# Altium PCB PCB.PcbDoc
Units mm, origin at the board's own origin, x right, y up, seen from the top; angles counter-clockwise.
Board outline 102.05 x 115.83 mm, 2 copper layers (Top Layer, Bottom Layer); 55 components, 34 nets, 211 pads, 93 vias.
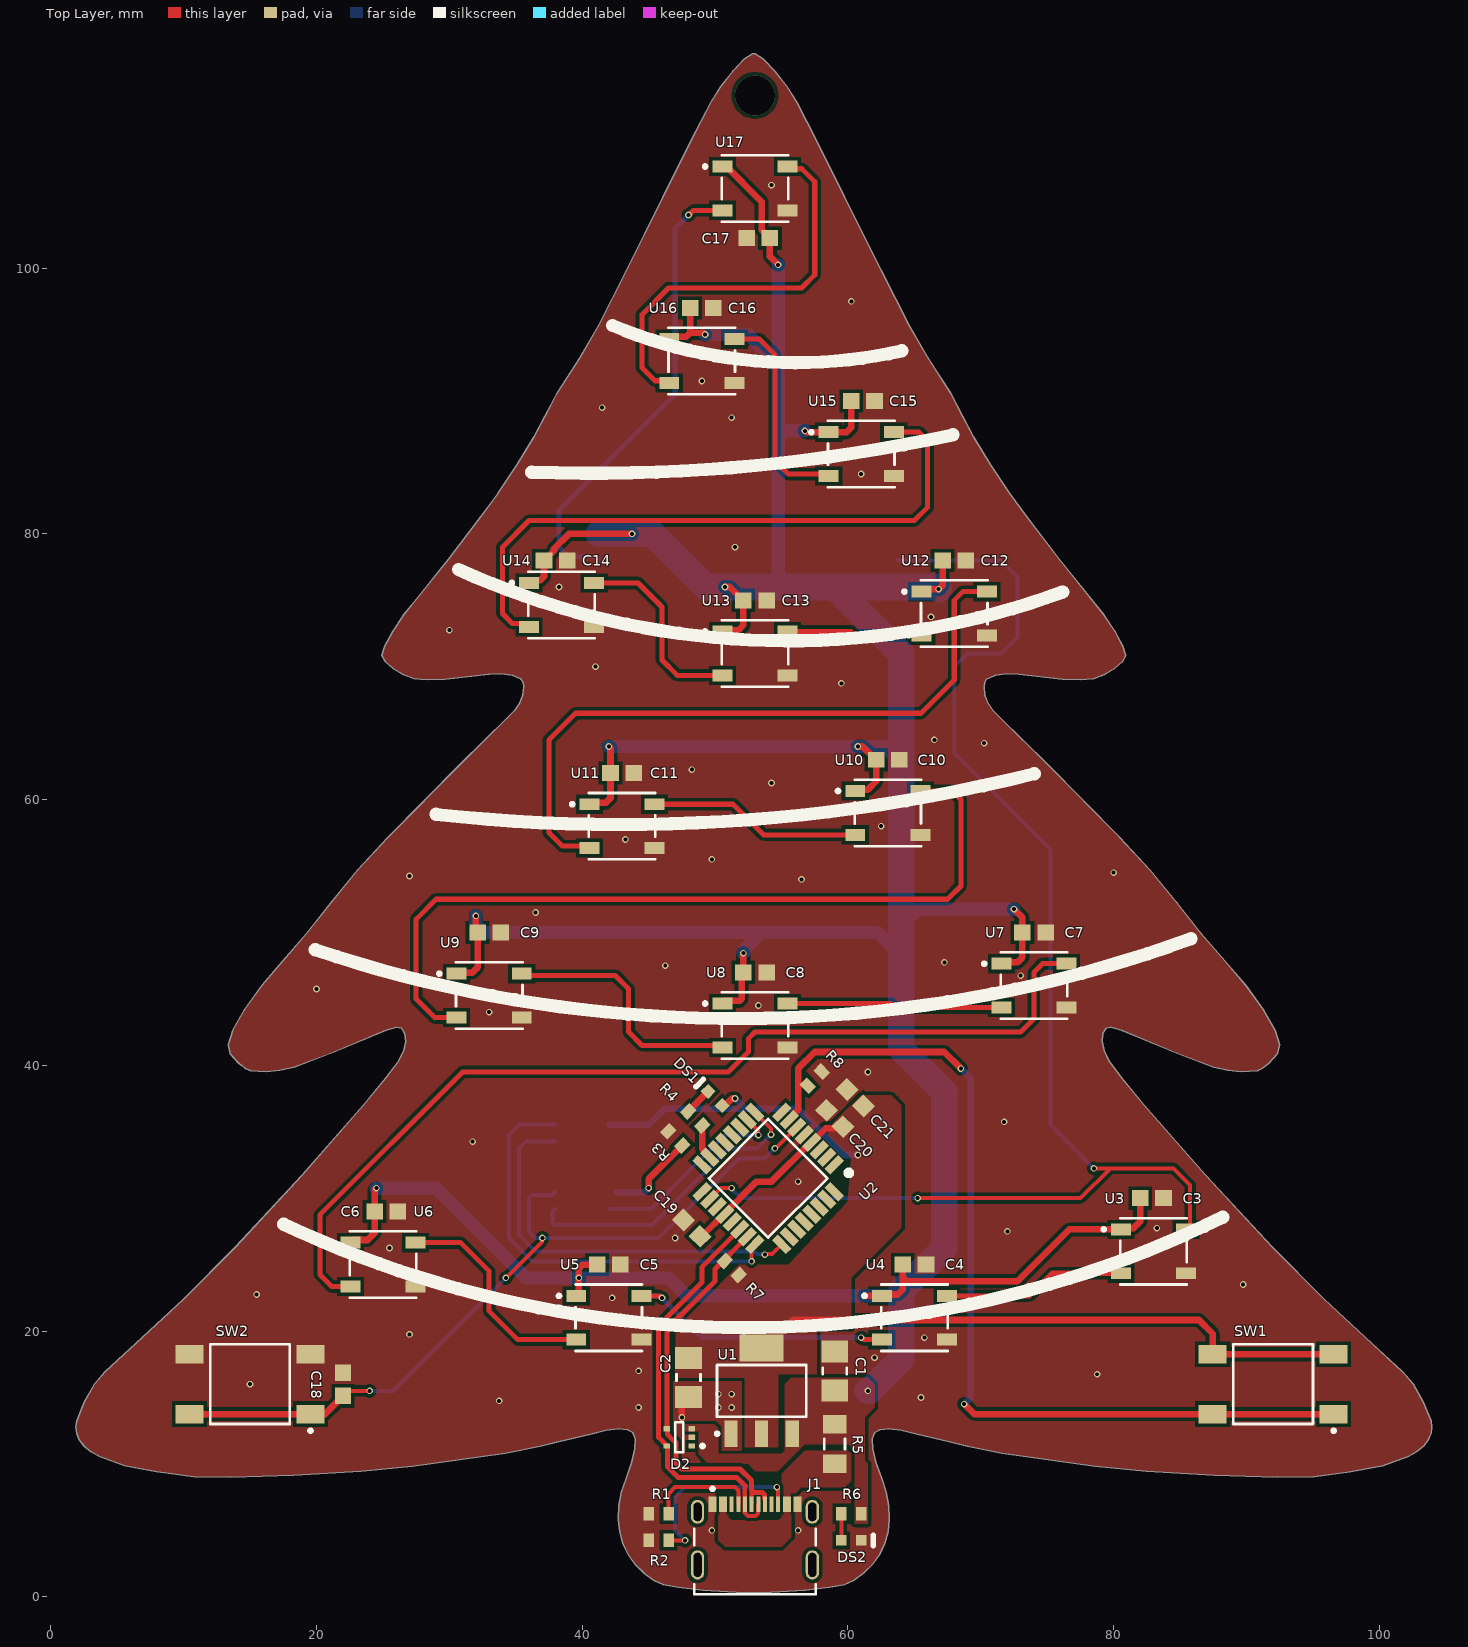
[diagram p0: Top Layer view]
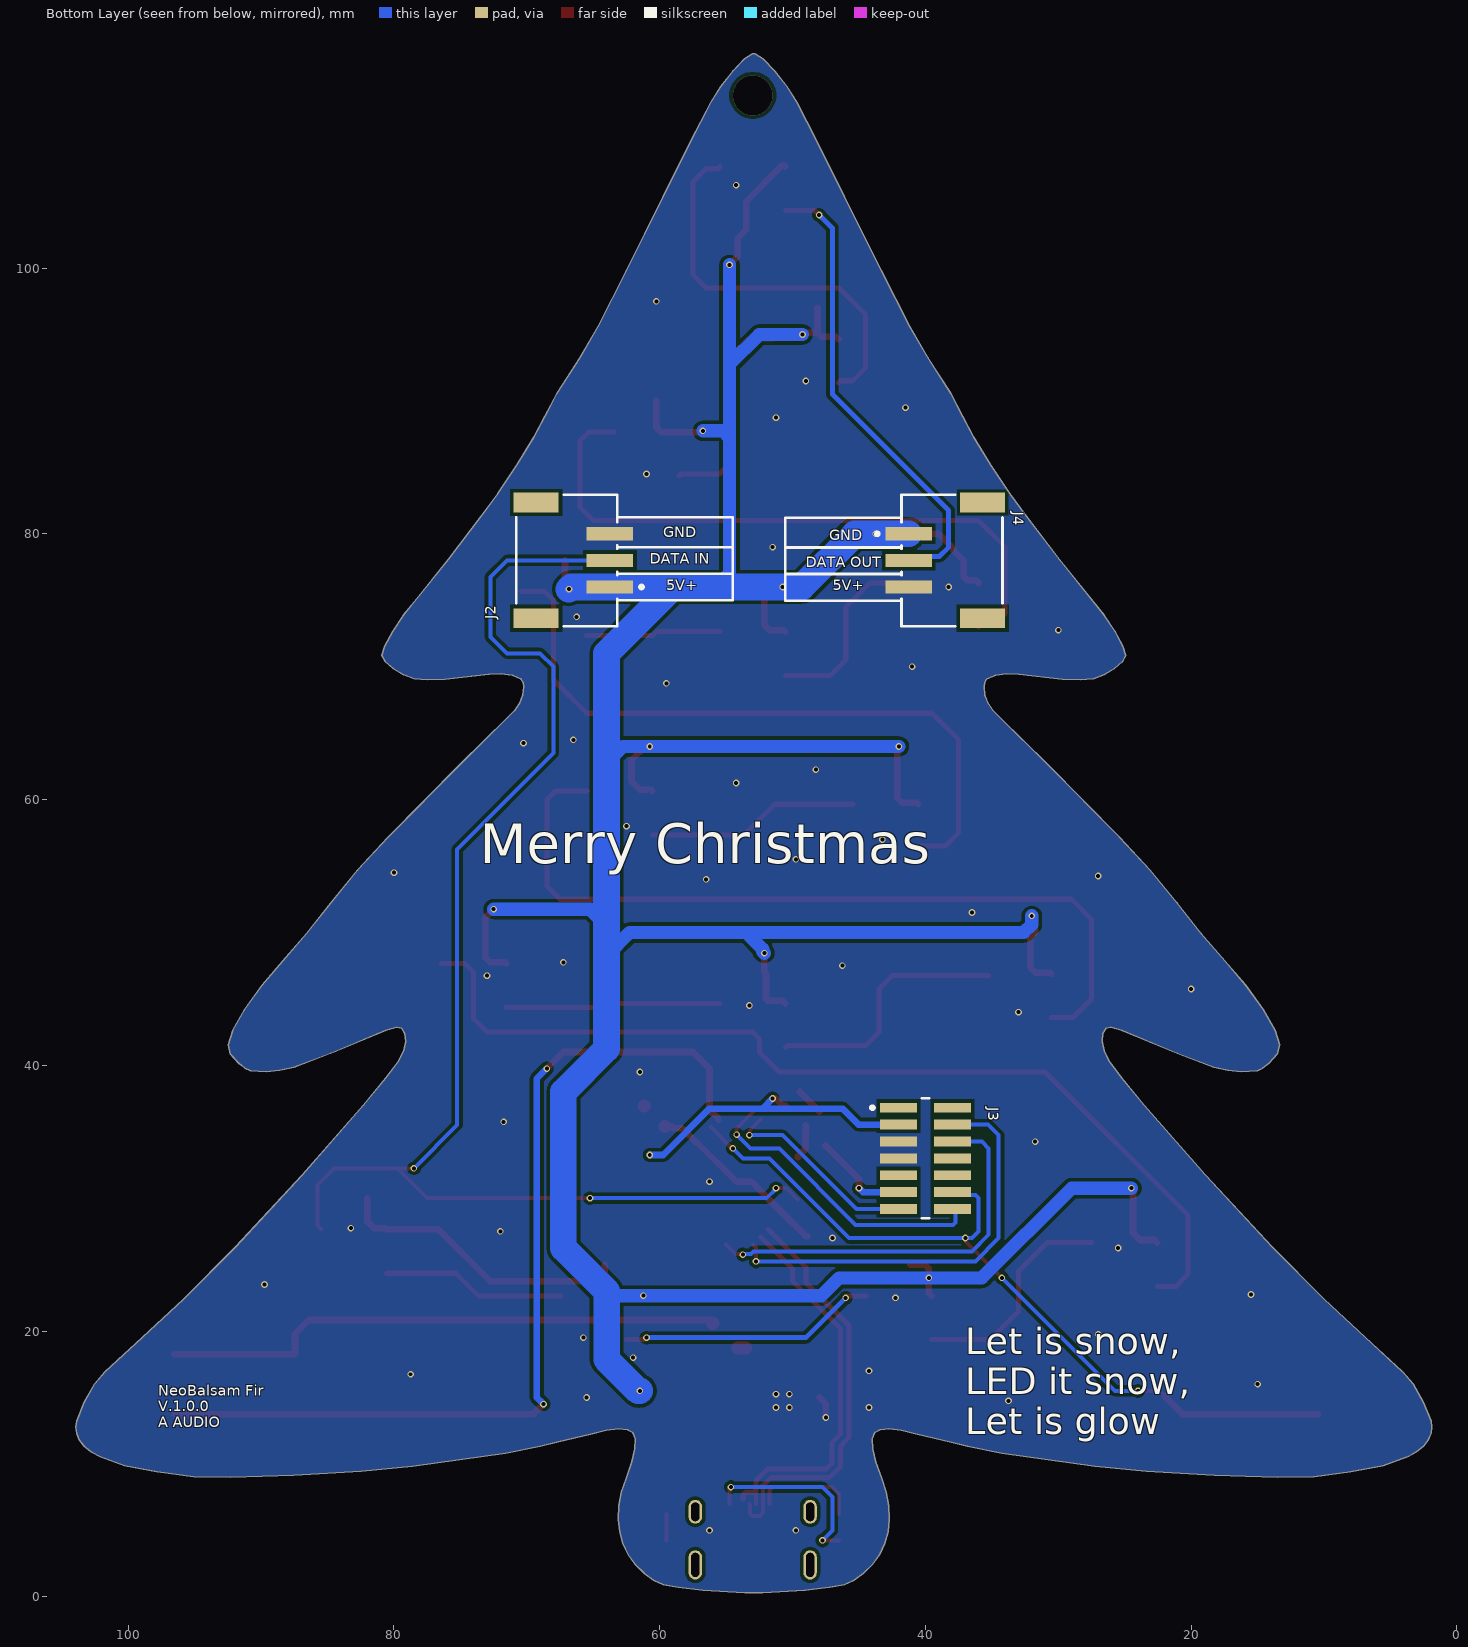
[diagram p1: Bottom Layer view, seen from below]
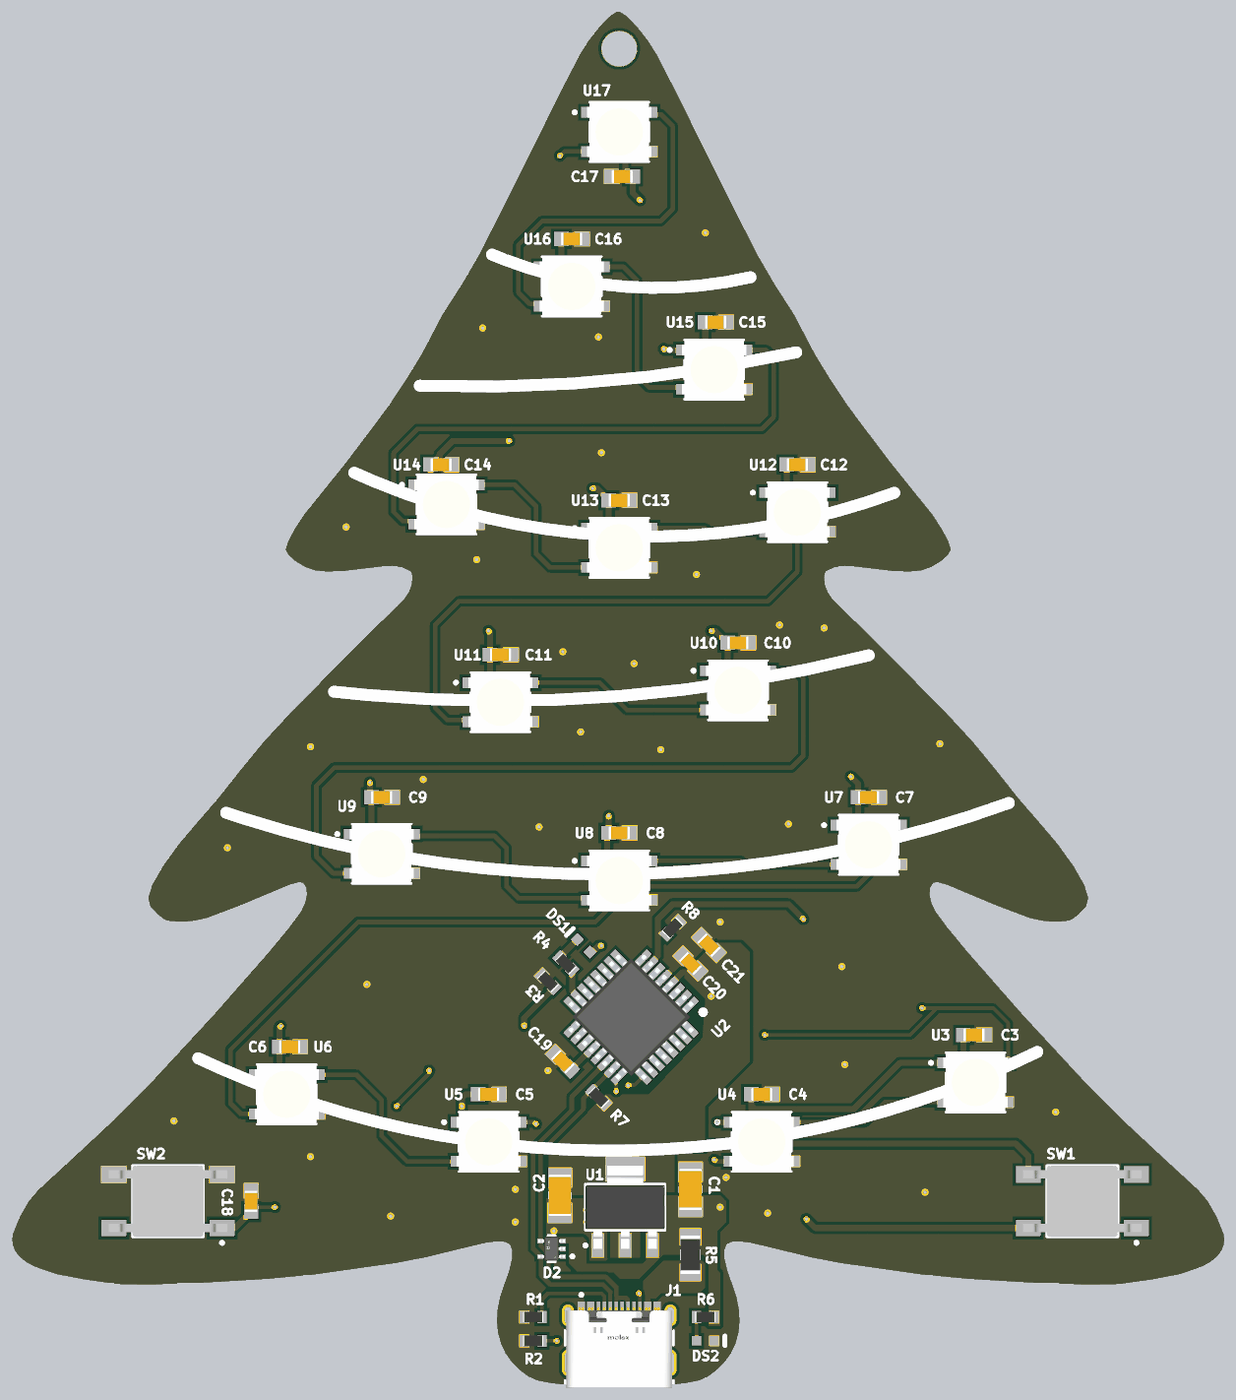
[diagram p2: 3D render of the assembled board from above, using the file's embedded part models]
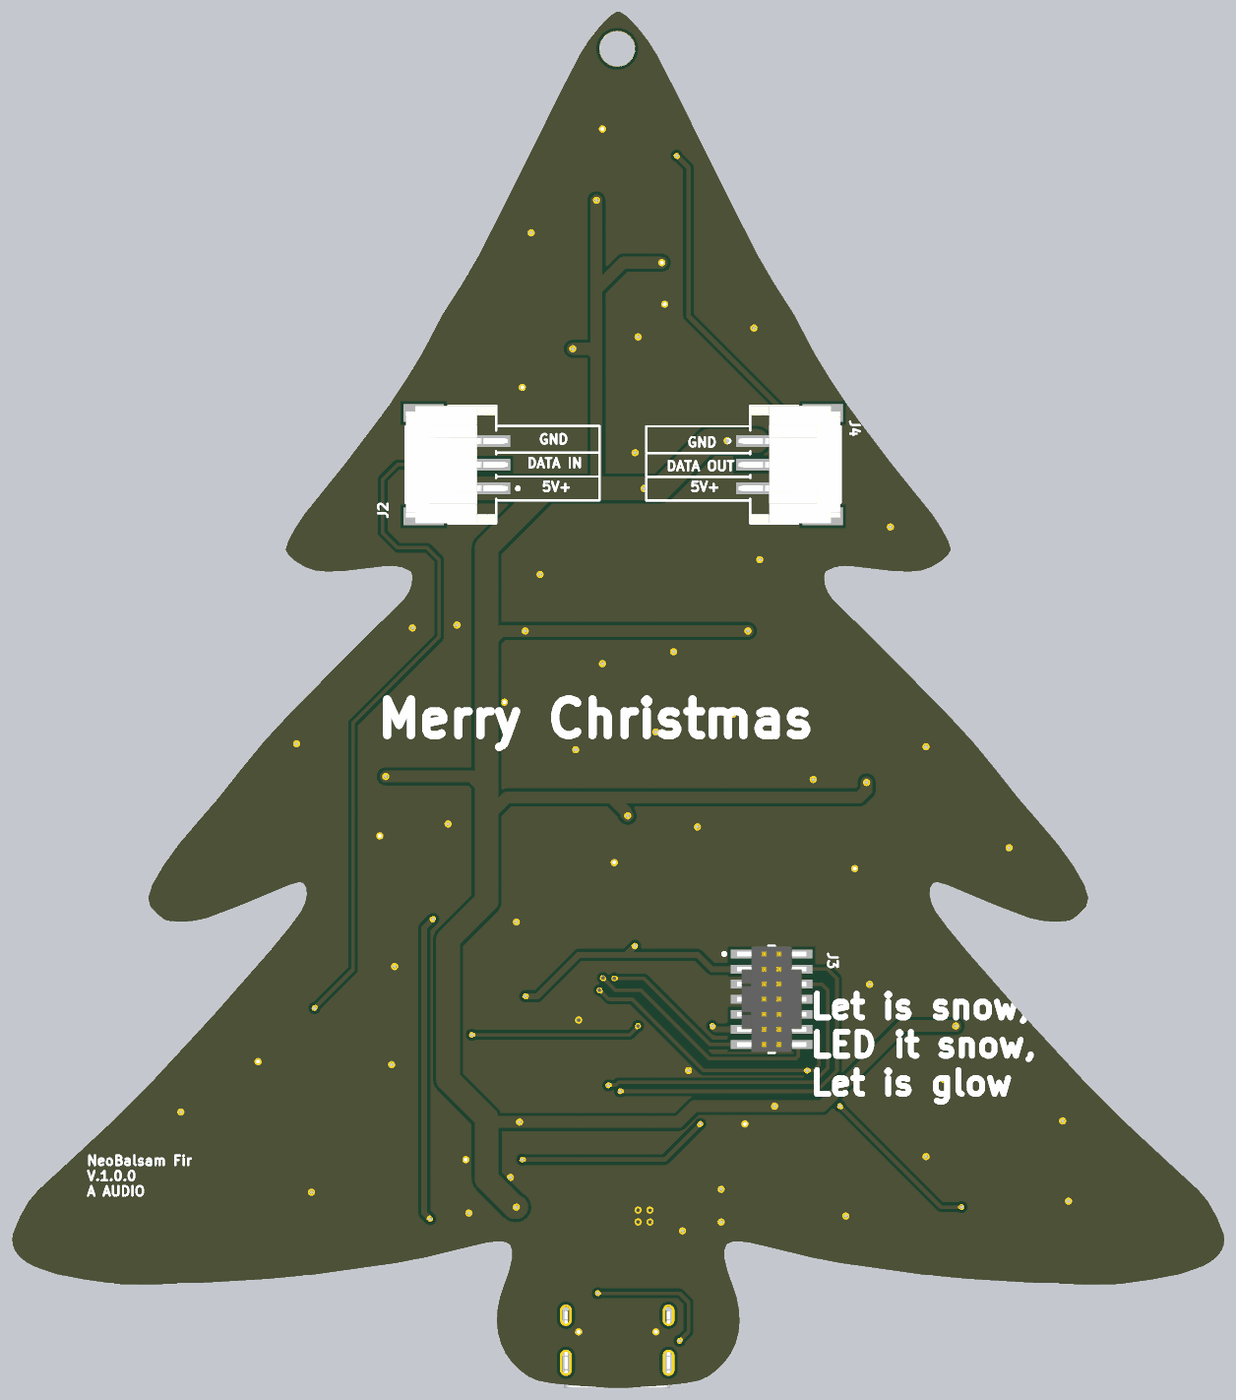
[diagram p3: 3D render of the assembled board from below, using the file's embedded part models]

## Layer stack, top to bottom
Top Solder: solder mask 0.0102, Solder Resist, Dk 3.5
Top Layer: signal copper 0.0356
Dielectric 1: dielectric 0.32, FR-4, Dk 4.8
Bottom Layer: signal copper 0.0356
Bottom Solder: solder mask 0.0102, Solder Resist, Dk 3.5

## Board outline
2.15,11.797 1.951,12.297 1.89,12.76 1.947,13.231 2.527,14.665 3.293,16.009 4.094,16.947 6.892,19.52 10.008,22.417 13.891,26.304 18.921,31.742 23.545,37.007 25.218,39.036 26.207,40.376 26.554,41.098 26.706,41.8 26.656,42.397 26.399,42.803 26.044,42.871 25.233,42.646 21.041,40.892 18.302,39.858 17.235,39.618 16.226,39.522 15.02,39.595 14.612,39.793 14.149,40.157 13.517,40.844 13.348,41.54 13.683,42.617 14.587,44.195 15.9,46.025 17.462,47.863 19.256,49.933 21.067,52.222 23.093,54.691 25.407,57.19 30.824,62.667 34.383,66.172 34.912,66.699 35.294,67.272 35.522,67.876 35.586,68.494 35.546,68.82 35.422,69.042 34.74,69.354 33.884,69.483 32.987,69.433 29.692,69.041 28.335,69.011 27.365,69.103 26.567,69.394 25.776,69.864 25.167,70.388 24.917,70.842 25.141,71.568 25.734,72.666 26.534,73.87 27.378,74.91 29.918,78.066 32.411,81.353 33.654,83.034 35.078,85.174 36.36,87.27 37.181,88.821 38.099,90.583 39.807,93.246 41.189,95.621 43.332,99.827 46.064,105.318 48.174,109.571 49.695,112.514 50.419,113.668 51.342,114.84 52.224,115.752 52.824,116.126 53.009,116.126 53.609,115.752 54.491,114.84 55.415,113.668 56.138,112.514 57.659,109.571 59.769,105.318 62.501,99.827 64.644,95.621 66.027,93.246 67.734,90.583 68.653,88.821 69.474,87.27 70.756,85.174 72.179,83.034 73.422,81.353 75.916,78.066 78.456,74.91 79.299,73.87 80.099,72.666 80.692,71.568 80.916,70.842 80.666,70.388 80.058,69.864 79.267,69.394 78.469,69.103 77.499,69.011 76.142,69.041 72.846,69.433 71.949,69.483 71.094,69.354 70.412,69.042 70.287,68.82 70.247,68.494 70.311,67.876 70.539,67.272 70.922,66.699 71.451,66.172 75.009,62.667 80.427,57.19 82.74,54.691 84.766,52.222 86.577,49.933 88.371,47.863 89.933,46.025 91.246,44.195 92.15,42.617 92.485,41.54 92.317,40.844 91.685,40.157 91.221,39.793 90.813,39.595 89.608,39.522 88.599,39.618 87.531,39.858 84.792,40.892 80.6,42.646 79.79,42.871 79.435,42.803 79.177,42.397 79.127,41.8 79.279,41.098 79.626,40.376 80.615,39.036 82.288,37.007 86.912,31.742 91.943,26.304 95.825,22.417 98.941,19.52 101.739,16.947 102.54,16.009 103.307,14.665 103.886,13.231 103.943,12.76 103.882,12.297 103.683,11.797 103.318,11.334 102.789,10.909 102.102,10.524 100.264,9.88 97.83,9.413 95.071,9.029 92.297,8.988 87.56,9.159 82.454,9.466 78.575,9.829 71.585,10.813 68.99,11.318 67.621,11.662 65.207,12.244 64.019,12.519 63.092,12.632 62.428,12.582 62.032,12.369 61.842,11.895 61.864,11.151 62.093,10.154 62.528,8.923 62.879,7.864 63.078,6.832 63.126,5.839 63.025,4.893 62.778,4.004 62.385,3.181 61.849,2.434 61.172,1.773 60.461,1.242 59.721,0.919 58.605,0.701 56.766,0.49 53.598,0.291 52.235,0.291 49.067,0.49 47.229,0.701 46.112,0.919 45.372,1.242 44.662,1.773 43.984,2.434 43.448,3.181 43.055,4.004 42.808,4.893 42.707,5.839 42.755,6.832 42.954,7.864 43.306,8.923 43.74,10.154 43.97,11.151 43.991,11.895 43.802,12.369 43.405,12.582 42.742,12.632 41.814,12.519 40.627,12.244 38.212,11.662 36.843,11.318 34.248,10.813 27.259,9.829 23.379,9.466 18.273,9.159 13.536,8.988 10.762,9.029 8.004,9.413 5.57,9.88 3.731,10.524 3.044,10.909 2.516,11.334

## Design rules (kind name [scope] priority, off if disabled: settings)
Clearance [All] p1: gap=0.254 ignorepadtopadclearanceinfootprint=TRUE except(0.125: Arc-Arc Arc-Track Arc-SMDPad Track-Track Track-SMDPad)
ComponentClearance [All] p1: gap=0.254 collisioncheckmode=3 verticalgap=2540 showdistances=FALSE
DiffPairsRouting [All] p1: maxlimit=0.254 minlimit=0.254 mostfreqgap=0.254 toplayer_minwidth=0.381 toplayer_maxwidth=0.381 toplayer_prefwidth=0.381 bottomlayer_minwidth=0.381 bottomlayer_maxwidth=0.381 bottomlayer_prefwidth=0.381 maxuncoupledlength=12.7
Height [All] p1: minheight=0 maxheight=1000 prefheight=12.7
HoleSize [All] p1: absolutevalues=TRUE maxlimit=8 minlimit=0.025 maxpercent=80.000 minpercent=20.000
PolygonConnect PolygonDirect [(IsNamedPolygon('PolygonDirect'))] p1: connectstyle=Direct reliefconductorwidth=0.254 reliefentries=4 polygonreliefangle="90 Angle" airgapwidth=0.254
PolygonConnect [All] p2: connectstyle=Relief reliefconductorwidth=0.254 reliefentries=4 polygonreliefangle="90 Angle" airgapwidth=0.254
RoutingVias [All] p1: holewidth=0.6 width=0.8 viastyle="Through Hole" minholewidth=0.3 minwidth=0.5 maxholewidth=1 maxwidth=2
SolderMaskExpansion [All] p1: expansion=0.05 istentingtop=FALSE
SupplyNets "Schematic Supply Nets_5" [InNet('5V')] p1: voltage=0.000
SupplyNets "Schematic Supply Nets_4" [InNet('3V3')] p2: voltage=0.000
SupplyNets "Schematic Supply Nets" [InNet('GND')] p3: voltage=0.000
Width [All] p1: maxlimit=5 minlimit=0.1 preferedwidth=0.3 minimp=50.000000 maximp=50.000000 favimp=50.000000
26 further rules are at their usual default settings.

## Classes and differential pairs
differential pair USB_D: +USB_D_P -USB_D_N

## Components (designator, comment, footprint, x,y, rotation, side; value= is the part's Value field where it differs from the comment)
C1 "Capacitor 1 uF +/-10% 100V 1206" CAPC3216X19M 59,17 r270 top value="1 uF"
C2 "Capacitor 4.7 uF +/-10% 50V 1206" CAPC3216X19M 48,16.5 r90 top value="4.7 uF"
C3 "Capacitor 0.1 uF 10 % 50V 0603" CAPC1609X09M 82.875,30 r180 top value=100nF
C4 "Capacitor 0.1 uF 10 % 50V 0603" CAPC1609X09M 65,25 r180 top value=100nF
C5 "Capacitor 0.1 uF 10 % 50V 0603" CAPC1609X09M 42,25 r180 top value=100nF
C6 "Capacitor 0.1 uF 10 % 50V 0603" CAPC1609X09M 25.25,29 r180 top value=100nF
C7 "Capacitor 0.1 uF 10 % 50V 0603" CAPC1609X09M 74,50 r180 top value=100nF
C8 "Capacitor 0.1 uF 10 % 50V 0603" CAPC1609X09M 53,47 r180 top value=100nF
C9 "Capacitor 0.1 uF 10 % 50V 0603" CAPC1609X09M 33,50 r180 top value=100nF
C10 "Capacitor 0.1 uF 10 % 50V 0603" CAPC1609X09M 63,63 r180 top value=100nF
C11 "Capacitor 0.1 uF 10 % 50V 0603" CAPC1609X09M 43,62 r180 top value=100nF
C12 "Capacitor 0.1 uF 10 % 50V 0603" CAPC1609X09M 68,78 r180 top value=100nF
C13 "Capacitor 0.1 uF 10 % 50V 0603" CAPC1609X09M 53,75 r180 top value=100nF
C14 "Capacitor 0.1 uF 10 % 50V 0603" CAPC1609X09M 38,78 r180 top value=100nF
C15 "Capacitor 0.1 uF 10 % 50V 0603" CAPC1609X09M 61.125,90 r180 top value=100nF
C16 "Capacitor 0.1 uF 10 % 50V 0603" CAPC1609X09M 49,97 r180 top value=100nF
C17 "Capacitor 0.1 uF 10 % 50V 0603" CAPC1609X09M 53.25,102.25 r0 top value=100nF
C18 "Capacitor 0.1 uF 10 % 50V 0603" CAPC1609X09M 22,16 r270 top value=100nF
C19 "Capacitor 0.1 uF 10 % 50V 0603" CAPC1609X09M 48.25,27.75 r135 top value=100nF
C20 "Capacitor 0.1 uF 10 % 50V 0603" CAPC1609X09M 59,36 r135 top value=100nF
C21 "Capacitor 4.7 uF 10 % 35V 0603" CAPC1609X09M 60.556,37.557 r315 top value=4.7µF
D2 "SP3003-02JTG" FP-SP3003-02JTG-MFG 47.3,12 r180 top value=0.65pF
DS1 "19-217/R6C-AL1M2VY/3T" EVRL-0603-2_V 50,37.5 r135 top
DS2 "19-217/R6C-AL1M2VY/3T" EVRL-0603-2_V 60.25,4.25 r0 top
J1 "217179-0001" FP-2171790001-MFG 53,3.55 r0 top
J2 "S3B-PH-SM4-TB(LF)(SN)" FP-S3B-PH-SM4-TB_LF_SN-MFG 67,78 r90 bottom
J3 "FTSH-107-01-F-DV-K" FP-FTSH-107-01-F-DV-K-MFG 40,33 r270 bottom
J4 "S3B-PH-SM4-TB(LF)(SN)" FP-S3B-PH-SM4-TB_LF_SN-MFG 38,78 r270 bottom
R1 "5K1 1 0603" RESC1608X55X25ML10T15 45.75,6.25 r0 top value=5.1k
R2 "5K1 1 0603" RESC1608X55X25ML10T15 45.75,4.25 r180 top value=5.1k
R3 "100R 1 0603" RESC1608X55X25ML10T15 47,34.5 r315 top value=100R
R4 "1K5 1 0603" RESC1608X55X25ML10T15 48.5,36 r315 top value=1.5k
R5 "Jumper 1206" RESC3116X70X50ML13T20 59,11.5 r90 top value=0
R6 "5K1 1 0603" RESC1608X55X25ML10T15 60.25,6.25 r180 top value=5.1k
R7 "1K5 1 0603" RESC1608X55X25ML10T15 51.25,24.75 r315 top value=1.5k
R8 "5K1 1 0603" RESC1608X55X25ML10T15 57.5,39 r45 top value=5.1k
SW1 "FSM4JSMA" TECO-FSM4JSMA_V 92,16 r270 top
SW2 "FSM4JSMA" TECO-FSM4JSMA_V 15,16 r270 top
U1 "LD1117S33TR" STM-SOT-223_M 53.5,15.5 r90 top
U2 "STM32G0B1KET6N" STM32G0B1KET6N-Footprint-1 54,31.5 r225 top
U3 "WS2812B" ADAI-WS2812B_V 83,26 r0 top
U4 "WS2812B" ADAI-WS2812B_V 65,21 r0 top
U5 "WS2812B" ADAI-WS2812B_V 42,21 r0 top
U6 "WS2812B" ADAI-WS2812B_V 25,25 r0 top
U7 "WS2812B" ADAI-WS2812B_V 74,46 r0 top
U8 "WS2812B" ADAI-WS2812B_V 53,43 r0 top
U9 "WS2812B" ADAI-WS2812B_V 33,45.25 r0 top
U10 "WS2812B" ADAI-WS2812B_V 63,59 r0 top
U11 "WS2812B" ADAI-WS2812B_V 43,58 r0 top
U12 "WS2812B" ADAI-WS2812B_V 68,74 r0 top
U13 "WS2812B" ADAI-WS2812B_V 53,71 r0 top
U14 "WS2812B" ADAI-WS2812B_V 38.45,74.65 r0 top
U15 "WS2812B" ADAI-WS2812B_V 61,86 r0 top
U16 "WS2812B" ADAI-WS2812B_V 49,93 r0 top
U17 "WS2812B" ADAI-WS2812B_V 53,106 r0 top

## Footprints (in the part's own frame and the unit in brackets; to place one, negate y for a bottom-side part, rotate by r counter-clockwise, add the part's x,y. Pads: shape width x height; smd on the part's side, far side on the other; paste and mask are expansions set on the pad)
ADAI-WS2812B_V [mm] "SMD, 4-Leads, Body 5x5mm, Pitch 3.3mm"
  rect 1.5x0.9 smd: 1(-2.45,1.65) 2(-2.45,-1.65) 3(2.45,-1.65) 4(2.45,1.65)
  silkscreen extent -3.87,-2.5 2.5,2.5, body extent -2.7,-2.5 2.7,2.5, height 1.69
CAPC1609X09M [mm] "Chip Capacitor, 2-Leads, Body 1.65x0.90mm, IPC Low Density"
  rect 1.25x1.2 smd: 1(-0.875,0) 2(0.875,0)
  body extent -0.9,-0.55 0.9,0.55, height 0.9
CAPC3216X19M [mm] "Chip Capacitor, 2-Leads, Body 3.20x1.60mm, IPC Low Density"
  rect 1.65x2 smd: 1(-1.475,0) 2(1.475,0)
  silkscreen extent -0.25,-0.9 0.25,0.9, body extent -1.75,-0.95 1.75,0.95, height 1.9
EVRL-0603-2_V [mm] "SMD, 2-Leads, Body 1.6x0.8mm"
  rect 0.8x0.8 smd: 1(-0.75,0) 2(0.75,0)
  silkscreen extent 1.65,-0.4 1.65,0.4, body extent -0.8,-0.4 0.8,0.4, height 0.5
FP-2171790001-MFG [mm]
  rrect100% 1x1.8 hole 1.4 slot 0.6 at 0 deg paste-2539.97 mask+0: 1(-4.32,2.85) 2(4.32,2.85)
  rrect100% 1x2.2 hole 1.8 slot 0.6 at 0 deg paste-2539.97 mask+0: 3(-4.32,-1.15) 4(4.32,-1.15)
  rect 0.6x1.15 smd paste+0 mask+0: A1-B12(-3.2,3.425) A4-B9(-2.4,3.425) B1-A12(3.2,3.425) B4-A9(2.4,3.425)
  rect 0.3x1.15 smd paste+0 mask+0: A5(-1.25,3.425) A6(-0.25,3.425) A7(0.25,3.425) A8(1.25,3.425) B5(1.75,3.425) B6(0.75,3.425) B7(-0.75,3.425) B8(-1.75,3.425)
  silkscreen extent -4.57,-3.35 4.57,4.7, body extent -4.47,-3.25 4.47,3.5, height 3.36
FP-FTSH-107-01-F-DV-K-MFG [mm]
  rect 0.74x2.79 smd paste+0 mask+0: 1(-3.81,-2.035) 2(-3.81,2.035) 3(-2.54,-2.035) 4(-2.54,2.035) 5(-1.27,-2.035) 6(-1.27,2.035) 7(0,-2.035) 8(0,2.035) 9(1.27,-2.035) 10(1.27,2.035) 11(2.54,-2.035) 12(2.54,2.035) 13(3.81,-2.035) 14(3.81,2.035)
  silkscreen extent -4.51,-4.12 4.51,0.27, body extent -4.45,-2.92 4.45,2.92, height 6.38
FP-S3B-PH-SM4-TB_LF_SN-MFG [mm]
  rect 1x3.5 smd paste+0 mask+0: 1(-2,-3.25) 2(0,-3.25) 3(2,-3.25)
  rect 1.5x3.4 smd paste+0 mask+0: 4(-4.35,2.3) 5(4.35,2.3)
  silkscreen extent -4.95,-5.75 4.95,3.8, body extent -4.95,-4.8 4.95,3.8, height 5.6
FP-SP3003-02JTG-MFG [mm]
  rect 0.5x0.4 smd paste+0 mask+0: 1(-0.95,0.65) 2(-0.95,0) 3(-0.95,-0.65) 4(0.95,-0.65) 5(0.95,0.65)
  silkscreen extent -1.88,-1.12 0.3,1.12, body extent -1.1,-1.02 1.1,1.02, height 1.1
RESC1608X55X25ML10T15 [mm] "Chip Resistor, 2-Leads, Body 1.70x0.90mm, IPC Low Density"
  rect 0.8x1 smd: 1(-0.75,0) 2(0.75,0)
  body extent -0.85,-0.45 0.85,0.45, height 0.55
RESC3116X70X50ML13T20 [mm] "Chip Resistor, 2-Leads, Body 3.25x1.65mm, IPC Low Density"
  rect 1.4x1.75 smd: 1(-1.5,0) 2(1.5,0)
  silkscreen extent -0.4,-0.77 0.4,0.77, body extent -1.63,-0.82 1.63,0.82, height 0.7
STM32G0B1KET6N-Footprint-1 [mm]
  rect 1.475x0.6 smd: 1(-4.238,2.8) 2(-4.238,2) 3(-4.238,1.2) 4(-4.238,0.4) 5(-4.238,-0.4) 6(-4.238,-1.2) 7(-4.238,-2) 8(-4.238,-2.8) 17(4.238,-2.8) 18(4.238,-2) 19(4.238,-1.2) 20(4.238,-0.4) 21(4.238,0.4) 22(4.238,1.2) 23(4.238,2) 24(4.238,2.8)
  rect 0.6x1.475 smd: 9(-2.8,-4.238) 10(-2,-4.238) 11(-1.2,-4.238) 12(-0.4,-4.238) 13(0.4,-4.238) 14(1.2,-4.238) 15(2,-4.238) 16(2.8,-4.238) 25(2.8,4.238) 26(2,4.238) 27(1.2,4.238) 28(0.4,4.238) 29(-0.4,4.238) 30(-1.2,4.238) 31(-2,4.238) 32(-2.8,4.238)
  silkscreen extent -4.77,-3.15 3.15,4.2, body extent -4.5,-4.5 4.5,4.5, height 1.6
STM-SOT-223_M [mm] "SOT223, 4-Leads, Body 6.7x3.7mm, Pitch 2.3mm, IPC Low Density"
  rect 2x1 smd: 1(-3.225,2.3) 2(-3.225,0) 3(-3.225,-2.3)
  rect 2x3.3 smd: 4(3.225,0)
  silkscreen extent -3.35,-3.35 1.95,3.47, body extent -3.5,-3.35 3.5,3.35, height 1.8
TECO-FSM4JSMA_V [mm] "SMD, 4-Leads, Body 6x6mm, Pitch 4.5mm"
  rect 1.4x2.1 smd: 1(2.25,4.55) 2(2.25,-4.55) 3(-2.25,4.55) 4(-2.25,-4.55)
  silkscreen extent -3,-3 3.62,4.68, body extent -3,-5 3,5, height 5.08

## Part data
C1: library part CMP-001-01157-1, "CAP CER 1UF 100V X7R 1206", Capacitor Type=Ceramic, Case/Package=1206, Tolerance=+/-10%, Voltage Rating=100V, Component Type="Surface Mount", Mounting Technology="Surface Mount", RoHS Compliant=Yes
C2: library part CMP-001-01179-1, "CAP CER 4.7UF 50V X7R 1206", Capacitor Type=Ceramic, Case/Package=1206, Tolerance=+/-10%, Voltage Rating=50V, Component Type="Surface Mount", Mounting Technology="Surface Mount", RoHS Compliant=Yes
C3 C4 C5 C6 C7 C8 C9 C10 C11 C12 C13 C14 C15 C16 C17 C18 C19 C20: library part CMP-001-00092-2, "CAP CER 0.1UF 50V X7R 0603", Capacitor Type=Ceramic, Case/Package=0603, Tolerance=10%, Voltage Rating=50V
C21: library part CMP-001-00124-1, "CAP CER 4.7UF 35V X5R 0603", Capacitor Type=Ceramic, Case/Package=0603, Tolerance=10%, Voltage Rating=35V
D2: library part CMP-08607-000046-1, "TVS DIODE 6V 15V SC70-5", Capacitance=0.65pF, Clamping Voltage=11.8V, Manufacturer=Littelfuse, Package=0, Peak Pulse Current=2.5A, Reverse Standoff Voltage=6V, Temperature="-40°C to +125°C", Temperature Range High=+125°C, Temperature Range Low=-40°C, Automotive=Yes, Automotive Grade="Grade 1", Category=Diode, ComponentLink2Description=Datasheet, ComponentLink2URL=https://www.littelfuse.com/~/media/electronics/datasheets/tvs_diode_arrays/littelfuse_tvs_diode_array_sp3003_datasheet.pdf.pdf, Device Class L1="Circuit Protection", Device Class L2="TVS Diodes", Device Class L3=unset, Digikey Description="TVS DIODE 6V 15V SC70-5", Direction=Bidirectional, Height=1.1mm, Ipc Land Pattern Name=SOT65P220X95-5, Lead Free=Yes, Manufacturer Part Number=SP3003-02JTG, Mouser Description="TVS Diodes / ESD Suppressors 2 Ch 8kV 0.65pF SPA", Number of Channels=2, Octopart=https://octopart.com/sp3003-02jtg-littelfuse-11540566, RoHS=TRUE, Standoff Height=0mm
DS1 DS2: library part CMP-007-00004-2, "Chip LED, Red, 5 V, 25 mA, -40 to 85 degC, 2-Pin SMD (0603), RoHS, Tape and Reel", Case/Package=0603, Colour=Red, Forward Voltage=2.2V, Manufacturer="Everlight Electronics", Package Description="2-Pin Surface Mount Device, Body 1.6 x 0.8 mm", Datasheet URL=https://datasheet.ciiva.com/4688/el-19-217-r6c-al1m2vy-3tpdf-187026-4688713.pdf, Datasheet Version="Rev. 1, 01/2005", Lens Style=Clear, Manufacturer URL=http://www.everlight.com/, Mounting Technology=SM, Package Reference=0603, RoHS Compliant=False
J1: library part CMP-04767-000028-2, "CONN RCP USB2.0 TYP C 24P SMD RA", Current Rating=1.25A, Max Operating Temperature=85°C, Min Operating Temperature=-40°C, Voltage Rating=30V, Contact Material="Gold, Nickel", Gender=Receptacle, Height=3.36mm, NexarPartId=117190526, Number of Contacts=16, USB Standard="USB 2.0"
J2 J4: library part CMP-2000-07023-2, "CONN HEADER SMD R/A 3POS 2MM", Color=Natural, Contact Resistance=10mR, Current Rating=2A, Flammability Rating="UL94 V-0", Housing Color=Beige, Insulation Resistance=1GR, Max Operating Temperature=85°C, Max Voltage Rating (AC)=100V, Min Operating Temperature=-25°C, Connector Type=Header, Contact Finish - Mating=TIN, Contact Material="Copper Alloy", Contact Mating Length=0.13inch, Contact Plating=Tin, Contact Shape=Square, Contact Type="Male Pin", Depth=7.6mm, Fastening Type=Detent, Gender=Male, Height=9.4mm, Housing Material=Polyamide, Insulation Color=Natural, Insulation Material=Nylon, Lead Free="Lead Free", Lead Pitch=2mm, Length=9.9mm, Material=Polyamide, Max Current Rating=2A, Max Voltage Rating (DC)=100V, Mount="Surface Mount", Number of Contacts=3, Number of Poles=3, Number of Positions=3, Number of Rows=1, Orientation="Right Angle", Packaging="Tape and Reel", Pitch=2mm, REACH SVHC="No SVHC", Series=PH, Termination=Solder, Voltage Rating=100V, Voltage Rating (AC)=100V, Width=5mm, Working Voltage=100V
J3: library part CMP-002-00095-3, "Board Connector, 14 Contact(s), 2 Row(s), Male, Straight, 0.05 inch Pitch, Surface Mount Terminal, Locking", Connector Type="BOARD CONNECTOR", Mounting Technology=Board, RoHS Compliant=Yes
R1 R2 R6 R8: library part CMP-0103-0600-4, "0603 (1608 Metric) 1/10 W 5K1 1 Thick Film Chip Resistor", Case-EIA=0603, Case-Metric=1608, Power=100mW, Temp. Coefficent=±100, Tolerance=1%, Technology=SMT
R3: library part CMP-0103-0559-4, "0603 (1608 Metric) 1/10 W 100R 1 Thick Film Chip Resistor", Case-EIA=0603, Case-Metric=1608, Power=100mW, Temp. Coefficent=±100, Tolerance=1%, Technology=SMT
R4 R7: library part CMP-0103-0587-4, "0603 (1608 Metric) 1/10 W 1K5 1 Thick Film Chip Resistor", Case-EIA=0603, Case-Metric=1608, Power=100mW, Temp. Coefficent=±100, Tolerance=1%, Technology=SMT
R5: library part CMP-0105-0510-4, "Jumper 1206 (3216 Metric)", Case-EIA=1206, Case-Metric=3216, Power=250mW, Temp. Coefficent=None, Tolerance=0%, Technology=SMT
SW1 SW2: library part CMP-00028-00007-2, "Switch Tactile OFF (ON) SPST Round Button Gull Wing 0.05A 12VDC 1.57N SMD Loose Piece", Case/Package=SMD/SMT, Max Current Rating=50mA, Voltage Rating=24V, Mounting Technology="Surface Mount"
U1: library part CMP-019-00019-3, "Low Drop Positive Voltage Regulator, 800 mA, Fixed 3.3 V Output, 0 to 125 degC, 3-Pin TO-220, RoHS, Tape and Reel", Case/Package=TO-261-4, Dropout Voltage=1.1V, Manufacturer=STMicroelectronics, Max Input Voltage=15V, Max Operating Temperature=125°C, Max Ouput Current=1.3A, Min Input Voltage=4.75V, Min Operating Temperature=0°C, Nominal Output Voltage=3.3V, Output Current=950mA, Package Description="4-Pin Small Outline Transistor, Body 6.5 x 3.5 mm, Pitch 2.3 mm", Package Quantity=2500, Package Reference=SOT-223, Power=12W, Datasheet URL=http://www.farnell.com/datasheets/1776449.pdf, Datasheet Version="Rev. 33, 11/2013", Manufacturer URL=http://www.st.com/, Max Supply Voltage=15V, Min Supply Voltage=4.75V, Mounting Technology=SM, Output Voltage=3.3V, Outputs=1, Packaging=TapeandReel, Pins=3, RoHS Compliant=True
U2: library part CMP-020-00025-3, "RISC Microcontroller, 32-Bit, FLASH, Cortex-M0+ CPU, 64MHz, CMOS, PQFP32"
U3 U4 U5 U6 U7 U8 U9 U10 U11 U12 U13 U14 U15 U16 U17: library part CMP-007-00035-2, "Intelligent Control LED Integrated Light Source, 3.5 to 5.3 V, -25 to 80 degC, 4-Pin SMD, RoHS, Bulk", Manufacturer="Adafruit Industries", Package Description="4-Pin Surface Mount Device, Body 5 x 5 mm, Pitch 3.3 mm", Case/Package=WS2812B, Datasheet URL=https://cdn-shop.adafruit.com/datasheets/WS2812B.pdf, Datasheet Version=May-13, Manufacturer URL=https://www.adafruit.com/, Mounting Technology=SM, Package Reference=WS2812B, RoHS Compliant=False

## Via types
v1: diameter 0.5, hole 0.3, Top Layer to Bottom Layer, 92 vias
v2: diameter 3, hole 3, Top Layer to Bottom Layer, 1 vias

## Nets (pads, with @x,y where several pads share a name; then routed paths per layer and width w, separated by ;. In a path a pad name is that pad's centre, name@x,y a point inside that pad or via, vN(x,y) a via of type N, cw(c..) or ccw(c..) an arc to the next point about the centre after c; other vN are vias at no path point)
3V3: C2.2 C19.1 C20.1 C21.2 DS1.1 J3.3 R7.2 SW1.3 SW1.4 U1.2 U1.4 U2.4 U2.20 | length 80.4
  Top Layer w0.5: C19.1 48.995,27.131 50.685,28.821 53.114,31.25 54.245,31.25 57.209,34.214 U2.4 58.331,35.266 58.973,35.266 59.106,35.399 C20.1@59.601,35.399 ; DS1.1 50.742,36.97 51.273,37.5 v1(51.5,37.5) ; 56,20.6 56.237,20.837 86.413,20.837 87.45,19.8 SW1.4 SW1.3
  Top Layer w1: U1.4 U1.4@54.15,18.725 ; 56,20.575 56,20.6
  Bottom Layer w0.5: J3.3 45.04,35.54 46.24,36.74 52.25,36.74 ; v1(51.5,37.5) 52.25,36.75 52.25,36.74 ; v1(60.75,33.25) 59.74,33.25 56.25,36.74 52.25,36.74
5V: C1.2 C3.2 C4.2 C5.2 C6.2 C7.2 C8.2 C9.2 C10.2 C11.2 C12.2 C13.2 C14.2 C15.2 C16.2 C17.2 D2.3 J2.1 J4.1 R5.2 R6.1 U1.3 U3.1 U4.1 U5.1 U6.1 U7.1 U8.1 U9.1 U10.1 U11.1 U12.1 U13.1 U14.1 U15.1 U16.1 U17.1 | length 338.4
  Top Layer w0.5: U6.1 22.75,26.85 23.85,26.85 24.375,27.375 C6.2 24.375,30.625 v1(24.5,30.75) ; U9.1 30.63,46.98 31.73,46.98 32.125,47.375 C9.2 ; C9.2@32,50.125 v1(32,51.25) ; U14.1 36.2,76.5 36.832,76.5 37.125,76.793 C14.2 37.15,78 37.875,78.725 37.875,78.875 39,80 v1(43.75,80) ; U5.1 39.75,22.85 39.75,24.707 40.043,25 C5.2 ; U11.1 40.65,59.75 41.75,59.75 42.125,60.125 C11.2 42.125,63.875 v1(42,64) ; U16.1 46.732,94.832 47.832,94.832 48.125,95.125 ; C16.2 48.125,95.125 ; v1(49.25,95) 49.125,95.125 48.125,95.125 ; U8.1 50.75,44.85 51.85,44.85 52,45 52,46.875 C8.2 v1(52.125,48.438) ; U13.1 50.65,72.75 51.75,72.75 52.125,73.125 C13.2 52.1,75 51.1,76 v1(50.75,76) ; U17.1 50.65,107.75 50.75,107.75 53.5,105 53.5,102.893 53.75,102.643 53.75,102.6 54.1,102.25 C17.2 54.125,100.875 v1(54.75,100.25) ; v1(56.75,87.75) 56.85,87.65 U15.1 59.9,87.65 60.25,88 C15.2 ; U10.1 60.65,60.75 61.5,60.75 62.125,61.375 C10.2 62.1,63 61.1,64 v1(60.75,64) ; v1(61.232,22.662) 61.244,22.65 U4.1 62.65,22.75 63.75,22.75 64.125,23.125 64.125,24.063 ; C4.2 64.125,24.063 ; U12.1 65.732,75.832 v1(66.832,75.832) 67.125,76.125 C12.2 ; U7.1 71.65,47.75 72.75,47.75 73.125,48.125 C7.2 73.125,51.125 v1(72.5,51.75) ; C3.2 82,28.25 81.5,27.75 80.65,27.75 U3.1 76.65,27.65 72.75,23.75 64.438,23.75 64.125,24.063
  Top Layer w1: C9.2@32,50.125 32,50.1 32.1,50 C9.2
  Bottom Layer w1: v1(24.5,30.75) 29,30.75 35.75,24 46.5,24 47.838,22.662 v1(61.232,22.662) 63.088,22.662 ; v1(32,51.25) 32,50.586 32.586,50 53.25,50 ; v1(42,64) v1(60.75,64) 62.75,64 64,62.75 ; v1(49.25,95) 52.5,95 54.75,92.75 ; v1(52.125,48.438) 52.25,48.562 52.25,48.75 53.25,49.75 53.25,50 ; v1(54.75,100.25) 54.75,92.75 ; 55.75,76 54.75,77 54.75,87.25 ; v1(56.75,87.75) 55.25,87.75 54.75,87.25 ; 64,48.25 62.25,50 53.25,50 ; 64.004,50.504 65.25,51.75 v1(72.5,51.75) ; 54.75,87.25 54.75,92.75
  Bottom Layer w2: J4.1 v1(43.75,80) 45.316,80 49.316,76 55.75,76 59,76 ; v1(61.5,15.5) 61.627,15.5 64,17.873 64,23 67.254,26.254 67.254,37.996 64.004,41.246 64.004,50.504 64.004,70.996 59,76 ; v1(66.832,75.832) 66.664,76 J2.1 59,76
  other v1: 39.75,24
DATA_IN: J2.2 U2.18 U3.4 | length 104.8
  Top Layer w0.3: U2.18 49.628,29.918 50.461,30.75 v1(51.25,30.75) ; v1(65.25,30) 77.5,30 79.75,32.25 ; v1(78.5,32.25) 79.75,32.25 ; U3.4 85.75,27.95 85.75,31 84.5,32.25 79.75,32.25
  Bottom Layer w0.3: v1(51.25,30.75) 51.25,30.696 51.946,30 v1(65.25,30) ; J2.2 71.5,78 72.75,76.75 72.75,72.25 71.5,71 69,71 68,70 68,63.5 75.25,56.25 75.25,35.5 v1(78.5,32.25)
DATA_OUT: J4.2 U17.2 | length 35.1
  Top Layer w0.381: v1(48,104) 48.032,104 48.382,104.35 U17.2
  Bottom Layer w0.381: J4.2 40.94,78.31 38.94,78.31 38.25,79 38.25,81.75 47,90.5 47,103 v1(48,104)
GND: C1.1 C2.1 C3.1 C4.1 C5.1 C6.1 C7.1 C8.1 C9.1 C10.1 C11.1 C12.1 C13.1 C14.1 C15.1 C16.1 C17.1 C18.1 C19.2 C20.2 C21.1 D2.2 DS2.2 J1.A1-B12 J1.B1-A12 J2.3 J3.5 J3.7 J4.3 R1.1 R2.2 R3.1 R8.2 SW2.3 SW2.4 U1.1 U2.5 U3.3 U4.3 U5.3 U6.3 U7.3 U8.3 U9.3 U10.3 U11.3 U12.3 U13.3 U14.3 U15.3 U16.3 U17.3 | length 1.7
  Top Layer w0.5: v1(47.5,13.5) 47.5,14.525 C2.1
  other v1: 49.75,5 56.25,5 44.25,14.25 50.25,14.25 51.25,14.25 33.75,14.75 65.5,15 50.25,15.25 51.25,15.25 15,16 78.75,16.75 44.25,17 62,18 65.75,19.5 27,19.75 42.25,22.5 15.5,22.75 89.75,23.5 25.5,26.25 47,27 72,27.5 83.25,27.75 56.25,31.25 31.75,34.25 71.75,35.75 61.5,39.5 33,44 53.25,44.5 20,45.75 73,46.75 46.25,47.5 67.25,47.75 36.5,51.5 56.5,54 27,54.25 80,54.5 49.75,55.5 43.25,57 62.5,58 54.25,61.25 48.25,62.25 70.25,64.25 66.5,64.5 59.5,68.75 41,70 30,72.75 66.25,73.75 38.25,76 51.5,79 61,84.5 51.25,88.75 41.5,89.5 49,91.5 60.25,97.5 54.25,106.25
JTCK/SWCLK: J3.6 U2.25 | length 30.1
  Top Layer w0.3: v1(53.75,25.75) 53.788,25.788 54.282,25.788 U2.25
  Bottom Layer w0.3: J3.6 37.945,34.25 35.75,34.25 35.25,33.75 35.25,27.25 36.5,26 52.925,26 53.137,25.788 53.712,25.788 v1(53.75,25.75)
JTMS/SWDIO: J3.4 U2.24 | length 31.9
  Top Layer w0.3: v1(52.75,25.25) 52.75,26.29 U2.24
  Bottom Layer w0.3: J3.4 35.29,35.54 34.5,34.75 34.5,27 36.25,25.25 v1(52.75,25.25)
LED1: R4.2 U2.15 | length 2.7
  Top Layer w0.5: R4.2 48.96,35.399 48.96,35.187 49.03,35.116 49.03,33.712 49.589,33.153 U2.15
NetDS1_2: DS1.2 R4.1 | length 2.1
  Top Layer w0.5: R4.1 DS1.2
NetDS2_1: DS2.1 R6.2 | length 2
  Top Layer w0.3: DS2.1 R6.2
NetJ1_A4-B9: J1.A4-B9 J1.B4-A9 R5.1
NetJ1_A5: J1.A5 R1.2 | length 8.1
  Top Layer w0.3: R1.2 46.5,7.75 47,8.25 51.5,8.25 51.75,8 J1.A5
NetJ1_B5: J1.B5 R2.1 | length 14.1
  Top Layer w0.3: R2.1 v1(47.75,4.25) ; v1(54.646,8.25) 54.646,8.196 54.75,8.092 J1.B5
  Bottom Layer w0.3: v1(47.75,4.25) 47,5 47,7.5 47.75,8.25 v1(54.646,8.25)
NetJ3_11: J3.11 R3.2 | length 6.8
  Top Layer w0.5: v1(45,30.75) 45,31.439 R3.2
  Bottom Layer w0.5: J3.11@42.57,30.46 44.71,30.46 v1(45,30.75)
NetU3_2: U3.2 U4.4 | length 13.8
  Top Layer w0.381: U4.4 73.65,22.65 75.35,24.35 U3.2
NetU4_2: U4.2 U5.4 | length 19.5
  Top Layer w0.381: U5.4 45.818,22.65 45.968,22.5 v1(46,22.5) ; v1(61,19.5) 61.032,19.5 61.182,19.35 U4.2
  Bottom Layer w0.381: v1(46,22.5) 49,19.5 v1(61,19.5)
NetU5_2: U5.2 U6.4 | length 16.9
  Top Layer w0.381: U6.4 30.85,26.65 33,24.5 33,21.5 35.15,19.35 U5.2
NetU6_2: U6.2 U7.4 | length 73.8
  Top Layer w0.381: U6.2 21.15,23.35 20.25,24.25 20.25,28.75 31,39.5 51,39.5 52.5,41 52.5,42 53,42.5 73,42.5 74,43.5 74,47 74.65,47.65 U7.4
NetU7_2: U7.2 U8.4 | length 16.2
  Top Layer w0.381: U8.4 63.22,44.65 63.52,44.35 U7.2
NetU8_2: U8.2 U9.4 | length 19.4
  Top Layer w0.381: U9.4@35.244,46.75 42.5,46.75 43.5,45.75 43.5,42.5 44.5,41.5 50.4,41.5 U8.2
NetU9_2: U9.2 U10.4 | length 61.5
  Top Layer w0.381: U9.2 28.9,43.6 27.5,45 27.5,51 29,52.5 67.5,52.5 68.5,53.5 68.5,60 67.85,60.65 U10.4
NetU10_2: U10.2 U11.4 | length 16.1
  Top Layer w0.381: U11.4 51.35,59.65 53.65,57.35 U10.2
NetU11_2: U11.2 U12.4 | length 51.6
  Top Layer w0.381: U11.2 40.4,56.5 38.5,56.5 37.5,57.5 37.5,64.5 39.5,66.5 65.5,66.5 68,69 68,75 68.65,75.65 U12.4
NetU12_2: U12.2 U13.4 | length 10.2
  Top Layer w0.381: U13.4 60.22,72.65 60.52,72.35 U12.2
NetU13_2: U13.2 U14.4 | length 14.9
  Top Layer w0.381: U14.4 44.2,76.3 46,74.5 46,70.5 47.15,69.35 U13.2
NetU14_2: U14.2 U15.4 | length 48.5
  Top Layer w0.381: U14.2 35.74,73.26 34.74,73.26 34,74 34,79 36,81 65,81 66,82 66,87 65.35,87.65 U15.4
NetU15_2: U15.2 U16.4 | length 16.1
  Top Layer w0.381: U16.4 53.35,94.65 54.5,93.5 54.5,85.5 55.5,84.5 58.4,84.5 U15.2
NetU16_2: U16.2 U17.4 | length 30.3
  Top Layer w0.381: U16.2 46.377,91.523 45.477,91.523 44.5,92.5 44.5,96.5 46.5,98.5 56.5,98.5 57.5,99.5 57.5,106.5 56.523,107.477 55.623,107.477 U17.4
NRST: C18.2 J3.12 SW2.1 SW2.2 U2.6 | length 60.7
  Top Layer w0.3: C18.2 22.375,15.5 v1(24,15.5) ; v1(34.25,24) 36.962,26.712 36.962,26.962 v1(37,27) ; v1(54.5,33.75) 54.553,33.75 U2.6
  Top Layer w0.5: SW2.2 SW2.1 20.65,13.75 22,15.1 C18.2
  Bottom Layer w0.3: v1(24,15.5) 25.75,15.5 v1(34.25,24) ; J3.12 37.745,30.24 36.24,30.24 36,30 36,27.5 36.5,27 v1(37,27) 45.75,27 51.75,33 53.724,33 54.474,33.75 v1(54.5,33.75)
UART2_RX: J3.13 U2.10 | length 15
  Top Layer w0.3: U2.10 53.225,35.104 53.225,34.775 v1(53.25,34.75)
  Bottom Layer w0.3: J3.13 45.19,29.19 50.75,34.75 v1(53.25,34.75)
UART2_TX: J3.14 U2.9 | length 22.6
  Top Layer w0.3: U2.9 54.212,35.248 v1(54.212,34.788)
  Bottom Layer w0.3: J3.14 37.75,28.975 37.75,28.176 37.926,28 45.25,28 51,33.75 53.175,33.75 v1(54.212,34.788) v1(54.212,34.788)
USB_D_N: D2.5 J1.A7 J1.B7 U2.22 | length 32.4
  Top Layer w0.3: 52.216,8.307 52.216,6.338 52.469,6.084 53.031,6.084 53.216,6.269 53.216,6.941 J1.A7 ; J1.B7@52.244,6.981 52.244,8.256
  Top Layer w0.381: U2.22 49,24.803 49,23.662 45.75,20.412 45.75,12 46.29,11.459 46.29,11.359 46.309,11.34 46.409,11.34 46.409,9.787 47.207,8.99 51.612,8.99 52.244,8.358 52.244,8.256
USB_D_P: D2.4 J1.A6 J1.B6 R7.1 U2.23 | length 29.3
  Top Layer w0.3: J1.A6 J1.A6@52.77,7.044 ; J1.A6@52.75,7.044 52.75,7.866 52.75,8.033
  Top Layer w0.381: D2.4@46.385,12.615 46.385,20.149 49.993,23.757 49.993,24.664 U2.23 ; D2.4@46.409,12.641 46.409,12.239 47.044,11.604 47.044,10.05 47.47,9.625 51.875,9.625 52.75,8.75 52.75,8.033 52.917,7.866 53.531,7.866 53.716,7.681 J1.B6@53.716,7.36
WAKE/CYCLE: R8.1 SW1.1 SW1.2 U2.7 | length 71.3
  Top Layer w0.5: U2.7 55.583,35.982 56.25,36.649 56.25,39.75 57.5,41 67.25,41 v1(68.5,39.75) ; v1(68.75,14.5) 69.5,13.75 SW1.2 SW1.1
  Bottom Layer w0.5: v1(68.5,39.75) 69.25,39 69.25,15 v1(68.75,14.5)
pads on no net: D2.1 J1.1 J1.2 J1.3 J1.4 J1.A8 J1.B8 J2.4 J2.5 J3.1 J3.2 J3.8 J3.9 J3.10 J4.4 J4.5 U2.1 U2.2 U2.3 U2.8 U2.11 U2.12 U2.13 U2.14 U2.16 U2.17 U2.19 U2.21 U2.26 U2.27 U2.28 U2.29 U2.30 U2.31 U2.32
copper on no net:
  other v2: 53,113

## Polygon pours and split planes (outlines as drawn)
GND on Top Layer "PolygonDirect" (solid, remove dead copper, pour order 7): 223 vertices, not listed, extent 1.89,0.291 103.943,116.126
3V3 on Top Layer "PolygonDirect" (solid, pour order 0): 55.5,25 60,29.75 60.25,33 58.5,34.75 58.5,35.25 59.25,36 61,37.75 63.25,37.75 64.019,36.981 64.019,27.769 60.25,24 60.25,20.232 57.553,20.232 57.659,20.232 57.659,16.75 54.75,16.75 54.75,11.25 52.25,11.25 52.25,16.5 47,16.5 47.055,20.232 51.824,25
NetJ1_A4-B9 on Top Layer "PolygonDirect" (solid, pour order 1): 50.25,7.5 51,7.5 51,6 51.25,5.75 54.75,5.75 55,6 55,9.25 56.75,11 60,11 60.25,10.75 60.25,8.75 59.75,8.25 56.5,8.25 55.75,7.5 55.75,4.5 55,3.75 50.75,3.75 50.25,4.25 50.25,7.25
5V on Top Layer "PolygonDirect" (solid, pour order 6): 60.077,11.5 60.5,11.077 60.5,5.5 61.5,5.5 61.5,10 61.25,10.25 61.25,13.461 61.231,13.481 62,14.25 62,16 61.5,16.5 55.75,16.5 55.25,16 55.25,11 55,10.75 50.25,10.75 50.25,12.695 49.945,13 47.75,13 47.75,12.25 48.75,12.25 48.75,10.75 49.5,10 52.5,10 53.034,9.466 54.716,9.466 56.75,11.5
GND on Bottom Layer "PolygonDirect" (solid, remove dead copper, pour order 3): 223 vertices, not listed, extent 1.89,0.291 103.943,116.126

## Silkscreen, mask and mechanical layers (free items; w line width, h text height)
Top Overlay:
  lines w1: 17.545,28.033 ccw(c52.32,101.909) 88.211,28.568 ; 19.898,48.695 ccw(c51.673,143.601) 85.812,49.519 ; 28.988,58.887 ccw(c42.975,185.91) 74.013,61.946 ; 30.689,77.316 ccw(c55.489,131.919) 76.164,75.625 ; 36.205,84.645 ccw(c40.87,212.35) 67.902,87.452 ; 42.286,95.679 ccw(c56.134,128.548) 64.052,93.771
Bottom Overlay:
  lines w0.2: 41.845,76.974 50.545,76.974 ; 41.845,78.974 50.545,78.974 ; 41.859,74.974 50.545,74.974 50.545,81.224 41.865,81.224 ; 54.5,77 63.2,77 ; 54.5,79 63.2,79 ; 63.18,81.25 54.5,81.25 54.5,75 63.185,75
  text "GND" at 59.746,79.754 h0.8
  text "GND" at 47.246,79.504 h0.8
  text "DATA IN" at 60.746,77.754 h0.8
  text "DATA OUT" at 48.996,77.504 h0.8
  text "5V+" at 46.996,75.754 h0.8
  text "5V+" at 59.496,75.754 h0.8
  text "Merry Christmas" at 73.55,55.2 h3
  text "NeoBalsam Fir / V.1.0.0 / A AUDIO" at 97.75,12.75 h0.8
  text "Let is snow, / LED it snow, / Let is glow" at 37,12.25 h2
Mechanical 2:
  drawing of 239 lines, arcs and shapes, not listed